# EAGLE board femtobuck-Panel-v10 (EAGLE 6.5.0), part 1 of 2
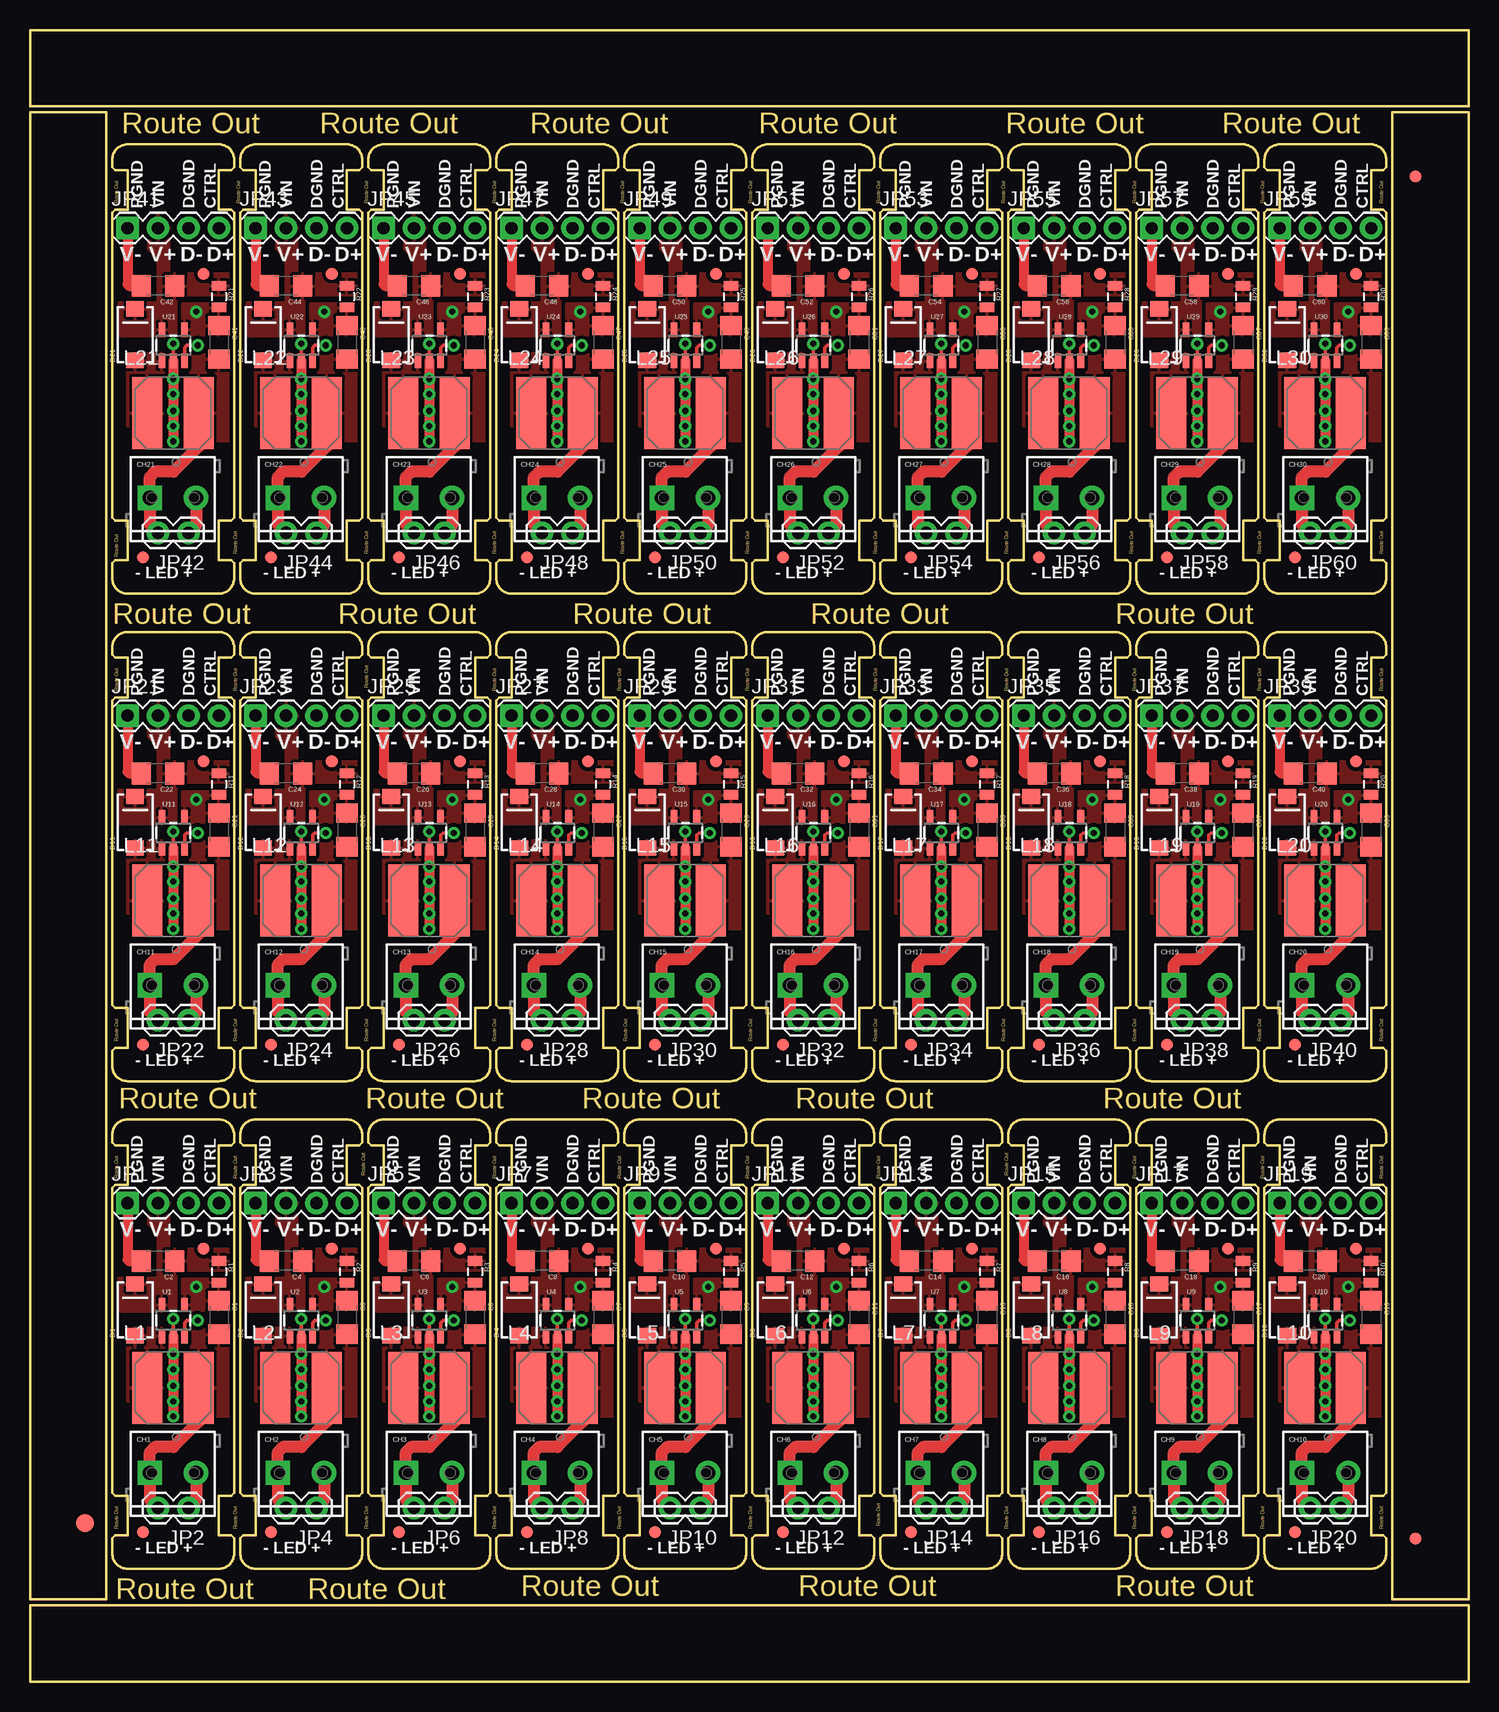
[diagram p0: board, top side]
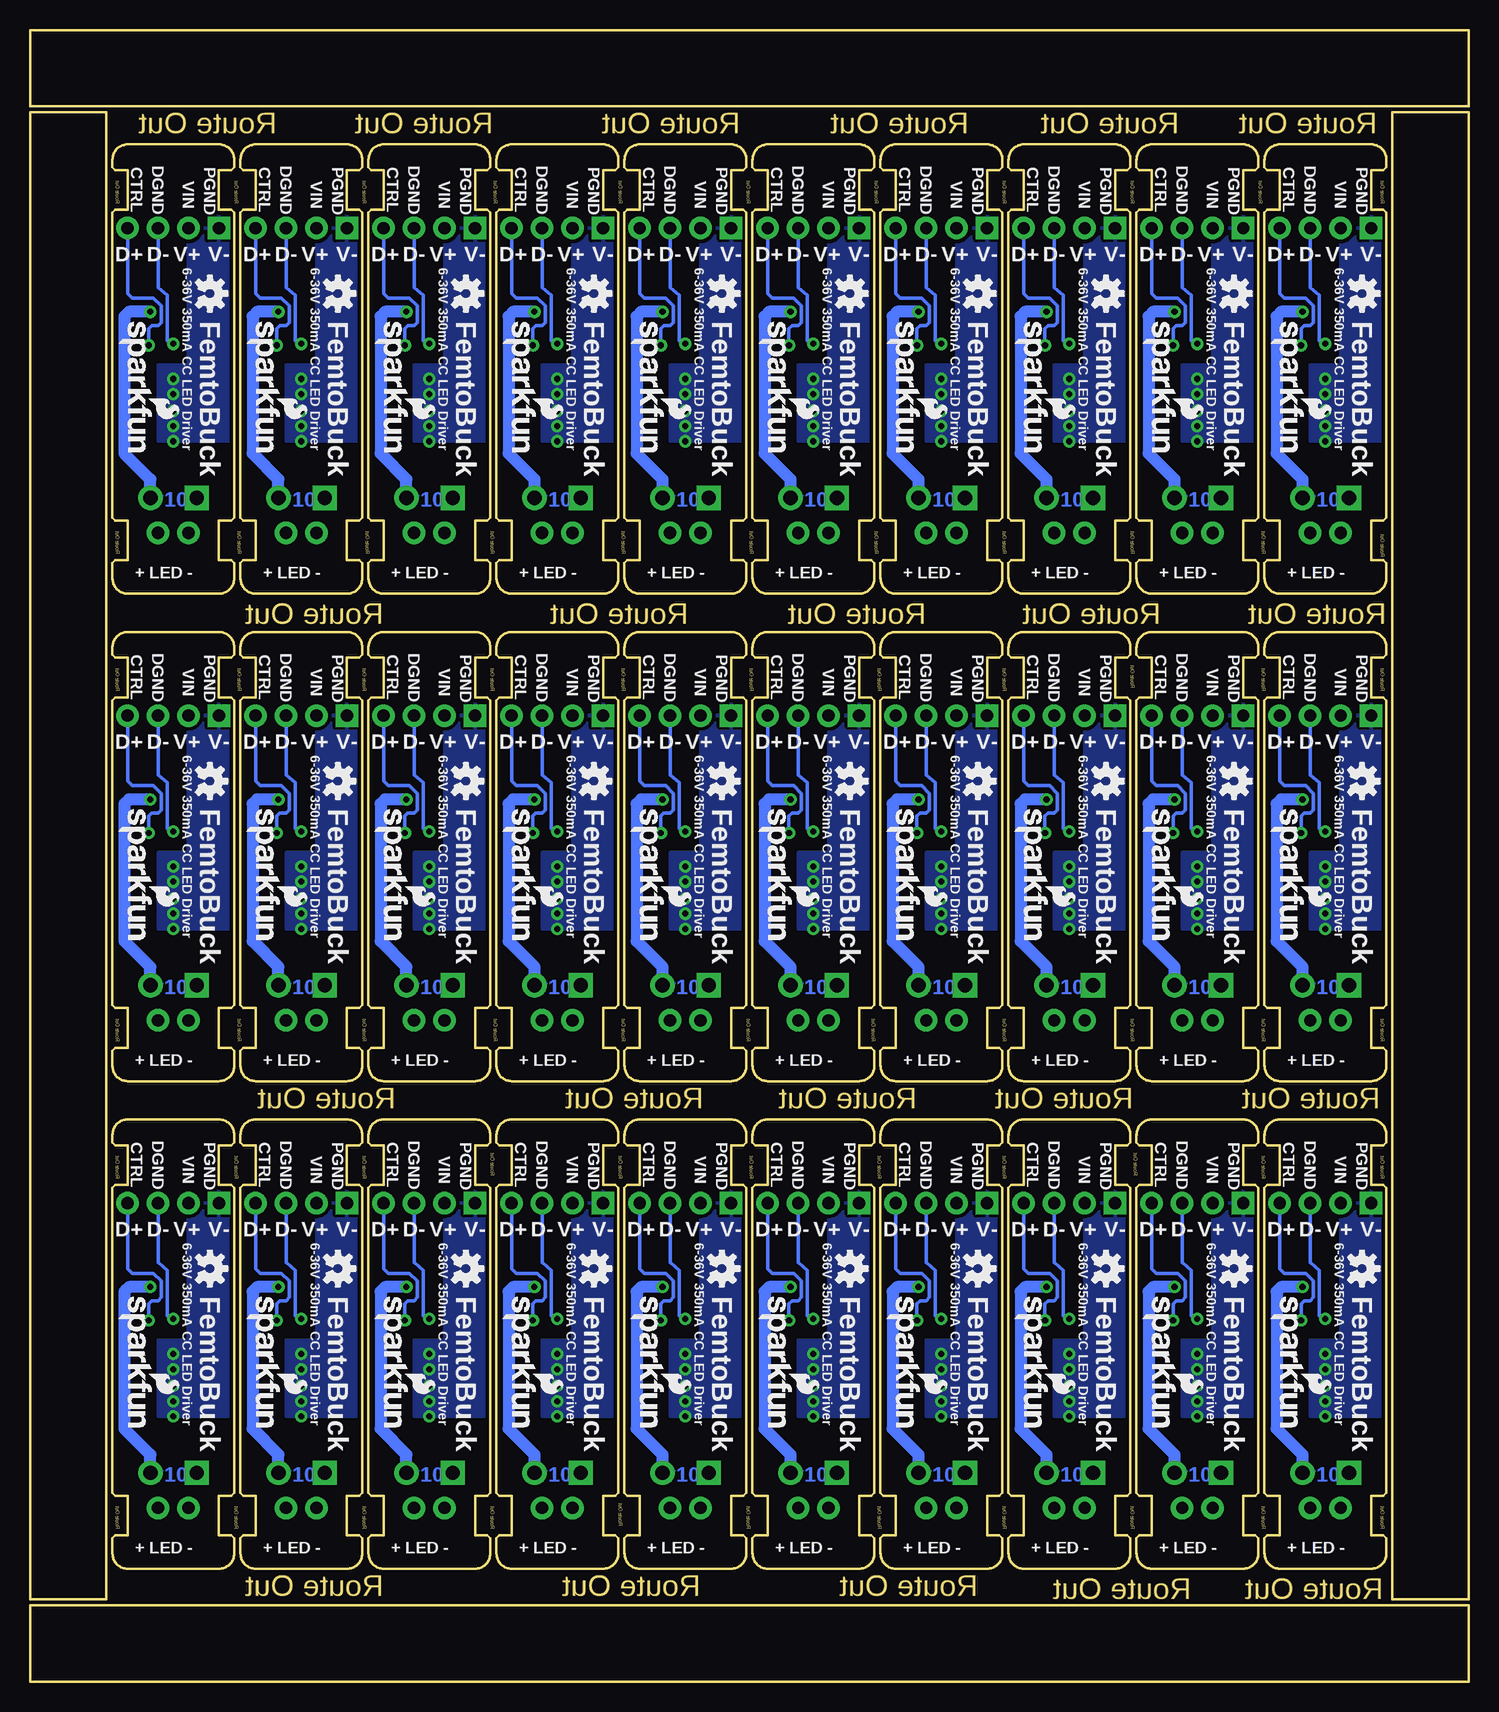
[diagram p1: board, bottom side, seen from below]

Size 119.89 x 137.67 mm. Coordinates in mm from the lower left corner, seen from the top.
Outline: 980 segments
Copper layers (1*16): Top 0.035mm / dielectric 1.5mm / Bottom 0.035mm
Design rules "Sparkfun": minimum track width 8mil, minimum drill 20mil, track to track 8mil, track to pad 8mil, pad to pad 8mil, via to via 8mil, smd to smd 8mil, copper to edge 8mil, drill to drill 8mil, minimum pad ring 12mil, minimum via ring 10mil, stop-mask expansion 4mil, vias tented up to drill 20mil, thermal gap 10mil
Net classes: 0 default: width 0.254 mm; 1 power: width 0.508 mm

## Footprints (pad centres in the part's own frame; a part is rotated, then mirrored left to right if it is on the bottom)
1206 = smd 1.6 x 1.8: 1 -1.4,0; 2 1.4,0
SCREWTERMINAL-3.5MM-2_LOCK = drill 1.2 pad 2.032 square: 1 -0.178,0 | drill 1.2 pad 2.032: 2 3.678,0
SMA-DIODE = smd 1.27 x 1.47: A -2.15,0; C 2.15,0
FIDUCIAL-1.5X3 = smd 1.5 x 1.5: 1 0,0
FIDUCIAL-1X2 = smd 1 x 1: 1 0,0
1X04 = drill 1.016 pad 1.88 square: 1 0,0 | drill 1.016 pad 1.88: 2 2.54,0; 3 5.08,0; 4 7.62,0
1X02 = drill 1.016 pad 1.88: 1 0,0; 2 2.54,0
SRN6045 = smd 2.5 x 6: 1 -2.175,-0.175; 2 2.125,-0.175
0805 = smd 0.8 x 1.2: 1 -0.9,0; 2 0.9,0
SOT23-5 = smd 0.55 x 1.2: 1 -0.95,-1.3; 2 0,-1.3; 3 0.95,-1.3; 4 0.95,1.3; 5 -0.95,1.3

## Placement (x,y rotation side)
C1  1uF  [1206]  15.75,30.35 270 top
C2  2.2uF  [1206]  10.67,35.05 180 top
C3  1uF  [1206]  26.42,30.35 270 top
C4  2.2uF  [1206]  21.34,35.05 180 top
C5  1uF  [1206]  37.08,30.35 270 top
C6  2.2uF  [1206]  32,35.05 180 top
C7  1uF  [1206]  47.75,30.35 270 top
C8  2.2uF  [1206]  42.67,35.05 180 top
C9  1uF  [1206]  58.42,30.35 270 top
C10  2.2uF  [1206]  53.34,35.05 180 top
C11  1uF  [1206]  69.09,30.35 270 top
C12  2.2uF  [1206]  64.01,35.05 180 top
C13  1uF  [1206]  79.76,30.35 270 top
C14  2.2uF  [1206]  74.68,35.05 180 top
C15  1uF  [1206]  90.42,30.35 270 top
C16  2.2uF  [1206]  85.34,35.05 180 top
C17  1uF  [1206]  101.09,30.35 270 top
C18  2.2uF  [1206]  96.01,35.05 180 top
C19  1uF  [1206]  111.76,30.35 270 top
C20  2.2uF  [1206]  106.68,35.05 180 top
C21  1uF  [1206]  15.75,70.99 270 top
C22  2.2uF  [1206]  10.67,75.69 180 top
C23  1uF  [1206]  26.42,70.99 270 top
C24  2.2uF  [1206]  21.34,75.69 180 top
C25  1uF  [1206]  37.08,70.99 270 top
C26  2.2uF  [1206]  32,75.69 180 top
C27  1uF  [1206]  47.75,70.99 270 top
C28  2.2uF  [1206]  42.67,75.69 180 top
C29  1uF  [1206]  58.42,70.99 270 top
C30  2.2uF  [1206]  53.34,75.69 180 top
C31  1uF  [1206]  69.09,70.99 270 top
C32  2.2uF  [1206]  64.01,75.69 180 top
C33  1uF  [1206]  79.76,70.99 270 top
C34  2.2uF  [1206]  74.68,75.69 180 top
C35  1uF  [1206]  90.42,70.99 270 top
C36  2.2uF  [1206]  85.34,75.69 180 top
C37  1uF  [1206]  101.09,70.99 270 top
C38  2.2uF  [1206]  96.01,75.69 180 top
C39  1uF  [1206]  111.76,70.99 270 top
C40  2.2uF  [1206]  106.68,75.69 180 top
C41  1uF  [1206]  15.75,111.63 270 top
C42  2.2uF  [1206]  10.67,116.33 180 top
C43  1uF  [1206]  26.42,111.63 270 top
C44  2.2uF  [1206]  21.34,116.33 180 top
C45  1uF  [1206]  37.08,111.63 270 top
C46  2.2uF  [1206]  32,116.33 180 top
C47  1uF  [1206]  47.75,111.63 270 top
C48  2.2uF  [1206]  42.67,116.33 180 top
C49  1uF  [1206]  58.42,111.63 270 top
C50  2.2uF  [1206]  53.34,116.33 180 top
C51  1uF  [1206]  69.09,111.63 270 top
C52  2.2uF  [1206]  64.01,116.33 180 top
C53  1uF  [1206]  79.76,111.63 270 top
C54  2.2uF  [1206]  74.68,116.33 180 top
C55  1uF  [1206]  90.42,111.63 270 top
C56  2.2uF  [1206]  85.34,116.33 180 top
C57  1uF  [1206]  101.09,111.63 270 top
C58  2.2uF  [1206]  96.01,116.33 180 top
C59  1uF  [1206]  111.76,111.63 270 top
C60  2.2uF  [1206]  106.68,116.33 180 top
CH1  [SCREWTERMINAL-3.5MM-2_LOCK]  10.16,17.4 0 top
CH2  [SCREWTERMINAL-3.5MM-2_LOCK]  20.83,17.4 0 top
CH3  [SCREWTERMINAL-3.5MM-2_LOCK]  31.5,17.4 0 top
CH4  [SCREWTERMINAL-3.5MM-2_LOCK]  42.16,17.4 0 top
CH5  [SCREWTERMINAL-3.5MM-2_LOCK]  52.83,17.4 0 top
CH6  [SCREWTERMINAL-3.5MM-2_LOCK]  63.5,17.4 0 top
CH7  [SCREWTERMINAL-3.5MM-2_LOCK]  74.17,17.4 0 top
CH8  [SCREWTERMINAL-3.5MM-2_LOCK]  84.84,17.4 0 top
CH9  [SCREWTERMINAL-3.5MM-2_LOCK]  95.5,17.4 0 top
CH10  [SCREWTERMINAL-3.5MM-2_LOCK]  106.17,17.4 0 top
CH11  [SCREWTERMINAL-3.5MM-2_LOCK]  10.16,58.04 0 top
CH12  [SCREWTERMINAL-3.5MM-2_LOCK]  20.83,58.04 0 top
CH13  [SCREWTERMINAL-3.5MM-2_LOCK]  31.5,58.04 0 top
CH14  [SCREWTERMINAL-3.5MM-2_LOCK]  42.16,58.04 0 top
CH15  [SCREWTERMINAL-3.5MM-2_LOCK]  52.83,58.04 0 top
CH16  [SCREWTERMINAL-3.5MM-2_LOCK]  63.5,58.04 0 top
CH17  [SCREWTERMINAL-3.5MM-2_LOCK]  74.17,58.04 0 top
CH18  [SCREWTERMINAL-3.5MM-2_LOCK]  84.84,58.04 0 top
CH19  [SCREWTERMINAL-3.5MM-2_LOCK]  95.5,58.04 0 top
CH20  [SCREWTERMINAL-3.5MM-2_LOCK]  106.17,58.04 0 top
CH21  [SCREWTERMINAL-3.5MM-2_LOCK]  10.16,98.68 0 top
CH22  [SCREWTERMINAL-3.5MM-2_LOCK]  20.83,98.68 0 top
CH23  [SCREWTERMINAL-3.5MM-2_LOCK]  31.5,98.68 0 top
CH24  [SCREWTERMINAL-3.5MM-2_LOCK]  42.16,98.68 0 top
CH25  [SCREWTERMINAL-3.5MM-2_LOCK]  52.83,98.68 0 top
CH26  [SCREWTERMINAL-3.5MM-2_LOCK]  63.5,98.68 0 top
CH27  [SCREWTERMINAL-3.5MM-2_LOCK]  74.17,98.68 0 top
CH28  [SCREWTERMINAL-3.5MM-2_LOCK]  84.84,98.68 0 top
CH29  [SCREWTERMINAL-3.5MM-2_LOCK]  95.5,98.68 0 top
CH30  [SCREWTERMINAL-3.5MM-2_LOCK]  106.17,98.68 0 top
D1  MBRA140  [SMA-DIODE]  8.76,30.99 90 top
D2  MBRA140  [SMA-DIODE]  19.43,30.99 90 top
D3  MBRA140  [SMA-DIODE]  30.1,30.99 90 top
D4  MBRA140  [SMA-DIODE]  40.77,30.99 90 top
D5  MBRA140  [SMA-DIODE]  51.44,30.99 90 top
D6  MBRA140  [SMA-DIODE]  62.1,30.99 90 top
D7  MBRA140  [SMA-DIODE]  72.77,30.99 90 top
D8  MBRA140  [SMA-DIODE]  83.44,30.99 90 top
D9  MBRA140  [SMA-DIODE]  94.11,30.99 90 top
D10  MBRA140  [SMA-DIODE]  104.78,30.99 90 top
D11  MBRA140  [SMA-DIODE]  8.76,71.63 90 top
D12  MBRA140  [SMA-DIODE]  19.43,71.63 90 top
D13  MBRA140  [SMA-DIODE]  30.1,71.63 90 top
D14  MBRA140  [SMA-DIODE]  40.77,71.63 90 top
D15  MBRA140  [SMA-DIODE]  51.44,71.63 90 top
D16  MBRA140  [SMA-DIODE]  62.1,71.63 90 top
D17  MBRA140  [SMA-DIODE]  72.77,71.63 90 top
D18  MBRA140  [SMA-DIODE]  83.44,71.63 90 top
D19  MBRA140  [SMA-DIODE]  94.11,71.63 90 top
D20  MBRA140  [SMA-DIODE]  104.78,71.63 90 top
D21  MBRA140  [SMA-DIODE]  8.76,112.27 90 top
D22  MBRA140  [SMA-DIODE]  19.43,112.27 90 top
D23  MBRA140  [SMA-DIODE]  30.1,112.27 90 top
D24  MBRA140  [SMA-DIODE]  40.77,112.27 90 top
D25  MBRA140  [SMA-DIODE]  51.44,112.27 90 top
D26  MBRA140  [SMA-DIODE]  62.1,112.27 90 top
D27  MBRA140  [SMA-DIODE]  72.77,112.27 90 top
D28  MBRA140  [SMA-DIODE]  83.44,112.27 90 top
D29  MBRA140  [SMA-DIODE]  94.11,112.27 90 top
D30  MBRA140  [SMA-DIODE]  104.78,112.27 90 top
E$1  [FIDUCIAL-1.5X3]  4.57,13.21 0 top
E$4  [FIDUCIAL-1X2]  115.44,11.94 0 top
E$5  [FIDUCIAL-1X2]  115.44,125.48 180 top
FID1  FIDUCIAL1X2  [FIDUCIAL-1X2]  14.48,36.07 0 top
FID2  FIDUCIAL1X2  [FIDUCIAL-1X2]  9.4,12.45 0 top
FID3  FIDUCIAL1X2  [FIDUCIAL-1X2]  25.15,36.07 0 top
FID4  FIDUCIAL1X2  [FIDUCIAL-1X2]  20.07,12.45 0 top
FID5  FIDUCIAL1X2  [FIDUCIAL-1X2]  35.81,36.07 0 top
FID6  FIDUCIAL1X2  [FIDUCIAL-1X2]  30.73,12.45 0 top
FID7  FIDUCIAL1X2  [FIDUCIAL-1X2]  46.48,36.07 0 top
FID8  FIDUCIAL1X2  [FIDUCIAL-1X2]  41.4,12.45 0 top
FID9  FIDUCIAL1X2  [FIDUCIAL-1X2]  57.15,36.07 0 top
FID10  FIDUCIAL1X2  [FIDUCIAL-1X2]  52.07,12.45 0 top
FID11  FIDUCIAL1X2  [FIDUCIAL-1X2]  67.82,36.07 0 top
FID12  FIDUCIAL1X2  [FIDUCIAL-1X2]  62.74,12.45 0 top
FID13  FIDUCIAL1X2  [FIDUCIAL-1X2]  78.49,36.07 0 top
FID14  FIDUCIAL1X2  [FIDUCIAL-1X2]  73.41,12.45 0 top
FID15  FIDUCIAL1X2  [FIDUCIAL-1X2]  89.15,36.07 0 top
FID16  FIDUCIAL1X2  [FIDUCIAL-1X2]  84.07,12.45 0 top
FID17  FIDUCIAL1X2  [FIDUCIAL-1X2]  99.82,36.07 0 top
FID18  FIDUCIAL1X2  [FIDUCIAL-1X2]  94.74,12.45 0 top
FID19  FIDUCIAL1X2  [FIDUCIAL-1X2]  110.49,36.07 0 top
FID20  FIDUCIAL1X2  [FIDUCIAL-1X2]  105.41,12.45 0 top
FID21  FIDUCIAL1X2  [FIDUCIAL-1X2]  14.48,76.71 0 top
FID22  FIDUCIAL1X2  [FIDUCIAL-1X2]  9.4,53.09 0 top
FID23  FIDUCIAL1X2  [FIDUCIAL-1X2]  25.15,76.71 0 top
FID24  FIDUCIAL1X2  [FIDUCIAL-1X2]  20.07,53.09 0 top
FID25  FIDUCIAL1X2  [FIDUCIAL-1X2]  35.81,76.71 0 top
FID26  FIDUCIAL1X2  [FIDUCIAL-1X2]  30.73,53.09 0 top
FID27  FIDUCIAL1X2  [FIDUCIAL-1X2]  46.48,76.71 0 top
FID28  FIDUCIAL1X2  [FIDUCIAL-1X2]  41.4,53.09 0 top
FID29  FIDUCIAL1X2  [FIDUCIAL-1X2]  57.15,76.71 0 top
FID30  FIDUCIAL1X2  [FIDUCIAL-1X2]  52.07,53.09 0 top
FID31  FIDUCIAL1X2  [FIDUCIAL-1X2]  67.82,76.71 0 top
FID32  FIDUCIAL1X2  [FIDUCIAL-1X2]  62.74,53.09 0 top
FID33  FIDUCIAL1X2  [FIDUCIAL-1X2]  78.49,76.71 0 top
FID34  FIDUCIAL1X2  [FIDUCIAL-1X2]  73.41,53.09 0 top
FID35  FIDUCIAL1X2  [FIDUCIAL-1X2]  89.15,76.71 0 top
FID36  FIDUCIAL1X2  [FIDUCIAL-1X2]  84.07,53.09 0 top
FID37  FIDUCIAL1X2  [FIDUCIAL-1X2]  99.82,76.71 0 top
FID38  FIDUCIAL1X2  [FIDUCIAL-1X2]  94.74,53.09 0 top
FID39  FIDUCIAL1X2  [FIDUCIAL-1X2]  110.49,76.71 0 top
FID40  FIDUCIAL1X2  [FIDUCIAL-1X2]  105.41,53.09 0 top
FID41  FIDUCIAL1X2  [FIDUCIAL-1X2]  14.48,117.35 0 top
FID42  FIDUCIAL1X2  [FIDUCIAL-1X2]  9.4,93.73 0 top
FID43  FIDUCIAL1X2  [FIDUCIAL-1X2]  25.15,117.35 0 top
FID44  FIDUCIAL1X2  [FIDUCIAL-1X2]  20.07,93.73 0 top
FID45  FIDUCIAL1X2  [FIDUCIAL-1X2]  35.81,117.35 0 top
FID46  FIDUCIAL1X2  [FIDUCIAL-1X2]  30.73,93.73 0 top
FID47  FIDUCIAL1X2  [FIDUCIAL-1X2]  46.48,117.35 0 top
FID48  FIDUCIAL1X2  [FIDUCIAL-1X2]  41.4,93.73 0 top
FID49  FIDUCIAL1X2  [FIDUCIAL-1X2]  57.15,117.35 0 top
FID50  FIDUCIAL1X2  [FIDUCIAL-1X2]  52.07,93.73 0 top
FID51  FIDUCIAL1X2  [FIDUCIAL-1X2]  67.82,117.35 0 top
FID52  FIDUCIAL1X2  [FIDUCIAL-1X2]  62.74,93.73 0 top
FID53  FIDUCIAL1X2  [FIDUCIAL-1X2]  78.49,117.35 0 top
FID54  FIDUCIAL1X2  [FIDUCIAL-1X2]  73.41,93.73 0 top
FID55  FIDUCIAL1X2  [FIDUCIAL-1X2]  89.15,117.35 0 top
FID56  FIDUCIAL1X2  [FIDUCIAL-1X2]  84.07,93.73 0 top
FID57  FIDUCIAL1X2  [FIDUCIAL-1X2]  99.82,117.35 0 top
FID58  FIDUCIAL1X2  [FIDUCIAL-1X2]  94.74,93.73 0 top
FID59  FIDUCIAL1X2  [FIDUCIAL-1X2]  110.49,117.35 0 top
FID60  FIDUCIAL1X2  [FIDUCIAL-1X2]  105.41,93.73 0 top
JP1  [1X04]  8.13,39.88 0 top
JP2  M02PTH  [1X02]  13.21,14.48 180 top
JP3  [1X04]  18.8,39.88 0 top
JP4  M02PTH  [1X02]  23.88,14.48 180 top
JP5  [1X04]  29.46,39.88 0 top
JP6  M02PTH  [1X02]  34.54,14.48 180 top
JP7  [1X04]  40.13,39.88 0 top
JP8  M02PTH  [1X02]  45.21,14.48 180 top
JP9  [1X04]  50.8,39.88 0 top
JP10  M02PTH  [1X02]  55.88,14.48 180 top
JP11  [1X04]  61.47,39.88 0 top
JP12  M02PTH  [1X02]  66.55,14.48 180 top
JP13  [1X04]  72.14,39.88 0 top
JP14  M02PTH  [1X02]  77.22,14.48 180 top
JP15  [1X04]  82.8,39.88 0 top
JP16  M02PTH  [1X02]  87.88,14.48 180 top
JP17  [1X04]  93.47,39.88 0 top
JP18  M02PTH  [1X02]  98.55,14.48 180 top
JP19  [1X04]  104.14,39.88 0 top
JP20  M02PTH  [1X02]  109.22,14.48 180 top
JP21  [1X04]  8.13,80.52 0 top
JP22  M02PTH  [1X02]  13.21,55.12 180 top
JP23  [1X04]  18.8,80.52 0 top
JP24  M02PTH  [1X02]  23.88,55.12 180 top
JP25  [1X04]  29.46,80.52 0 top
JP26  M02PTH  [1X02]  34.54,55.12 180 top
JP27  [1X04]  40.13,80.52 0 top
JP28  M02PTH  [1X02]  45.21,55.12 180 top
JP29  [1X04]  50.8,80.52 0 top
JP30  M02PTH  [1X02]  55.88,55.12 180 top
JP31  [1X04]  61.47,80.52 0 top
JP32  M02PTH  [1X02]  66.55,55.12 180 top
JP33  [1X04]  72.14,80.52 0 top
JP34  M02PTH  [1X02]  77.22,55.12 180 top
JP35  [1X04]  82.8,80.52 0 top
JP36  M02PTH  [1X02]  87.88,55.12 180 top
JP37  [1X04]  93.47,80.52 0 top
JP38  M02PTH  [1X02]  98.55,55.12 180 top
JP39  [1X04]  104.14,80.52 0 top
JP40  M02PTH  [1X02]  109.22,55.12 180 top
JP41  [1X04]  8.13,121.16 0 top
JP42  M02PTH  [1X02]  13.21,95.76 180 top
JP43  [1X04]  18.8,121.16 0 top
JP44  M02PTH  [1X02]  23.88,95.76 180 top
JP45  [1X04]  29.46,121.16 0 top
JP46  M02PTH  [1X02]  34.54,95.76 180 top
JP47  [1X04]  40.13,121.16 0 top
JP48  M02PTH  [1X02]  45.21,95.76 180 top
JP49  [1X04]  50.8,121.16 0 top
JP50  M02PTH  [1X02]  55.88,95.76 180 top
JP51  [1X04]  61.47,121.16 0 top
JP52  M02PTH  [1X02]  66.55,95.76 180 top
JP53  [1X04]  72.14,121.16 0 top
JP54  M02PTH  [1X02]  77.22,95.76 180 top
JP55  [1X04]  82.8,121.16 0 top
JP56  M02PTH  [1X02]  87.88,95.76 180 top
JP57  [1X04]  93.47,121.16 0 top
JP58  M02PTH  [1X02]  98.55,95.76 180 top
JP59  [1X04]  104.14,121.16 0 top
JP60  M02PTH  [1X02]  109.22,95.76 180 top
L1  33uH  [SRN6045]  11.94,24.64 0 top
L2  33uH  [SRN6045]  22.61,24.64 0 top
L3  33uH  [SRN6045]  33.27,24.64 0 top
L4  33uH  [SRN6045]  43.94,24.64 0 top
L5  33uH  [SRN6045]  54.61,24.64 0 top
L6  33uH  [SRN6045]  65.28,24.64 0 top
L7  33uH  [SRN6045]  75.95,24.64 0 top
L8  33uH  [SRN6045]  86.61,24.64 0 top
L9  33uH  [SRN6045]  97.28,24.64 0 top
L10  33uH  [SRN6045]  107.95,24.64 0 top
L11  33uH  [SRN6045]  11.94,65.28 0 top
L12  33uH  [SRN6045]  22.61,65.28 0 top
L13  33uH  [SRN6045]  33.27,65.28 0 top
L14  33uH  [SRN6045]  43.94,65.28 0 top
L15  33uH  [SRN6045]  54.61,65.28 0 top
L16  33uH  [SRN6045]  65.28,65.28 0 top
L17  33uH  [SRN6045]  75.95,65.28 0 top
L18  33uH  [SRN6045]  86.61,65.28 0 top
L19  33uH  [SRN6045]  97.28,65.28 0 top
L20  33uH  [SRN6045]  107.95,65.28 0 top
L21  33uH  [SRN6045]  11.94,105.92 0 top
L22  33uH  [SRN6045]  22.61,105.92 0 top
L23  33uH  [SRN6045]  33.27,105.92 0 top
L24  33uH  [SRN6045]  43.94,105.92 0 top
L25  33uH  [SRN6045]  54.61,105.92 0 top
L26  33uH  [SRN6045]  65.28,105.92 0 top
L27  33uH  [SRN6045]  75.95,105.92 0 top
L28  33uH  [SRN6045]  86.61,105.92 0 top
L29  33uH  [SRN6045]  97.28,105.92 0 top
L30  33uH  [SRN6045]  107.95,105.92 0 top
LOGO1  OSHW-LOGOS  [OSHW-LOGO-S]  8.89,34.42 270 bottom
LOGO2  SFE_LOGO_NAME_FLAME.1_INCH  [SFE_LOGO_NAME_FLAME_.1]  16.64,32.51 270 bottom
LOGO3  OSHW-LOGOS  [OSHW-LOGO-S]  19.56,34.42 270 bottom
LOGO4  SFE_LOGO_NAME_FLAME.1_INCH  [SFE_LOGO_NAME_FLAME_.1]  27.3,32.51 270 bottom
LOGO5  OSHW-LOGOS  [OSHW-LOGO-S]  30.23,34.42 270 bottom
LOGO6  SFE_LOGO_NAME_FLAME.1_INCH  [SFE_LOGO_NAME_FLAME_.1]  37.97,32.51 270 bottom
LOGO7  OSHW-LOGOS  [OSHW-LOGO-S]  40.89,34.42 270 bottom
LOGO8  SFE_LOGO_NAME_FLAME.1_INCH  [SFE_LOGO_NAME_FLAME_.1]  48.64,32.51 270 bottom
LOGO9  OSHW-LOGOS  [OSHW-LOGO-S]  51.56,34.42 270 bottom
LOGO10  SFE_LOGO_NAME_FLAME.1_INCH  [SFE_LOGO_NAME_FLAME_.1]  59.31,32.51 270 bottom
LOGO11  OSHW-LOGOS  [OSHW-LOGO-S]  62.23,34.42 270 bottom
LOGO12  SFE_LOGO_NAME_FLAME.1_INCH  [SFE_LOGO_NAME_FLAME_.1]  69.98,32.51 270 bottom
LOGO13  OSHW-LOGOS  [OSHW-LOGO-S]  72.9,34.42 270 bottom
LOGO14  SFE_LOGO_NAME_FLAME.1_INCH  [SFE_LOGO_NAME_FLAME_.1]  80.64,32.51 270 bottom
LOGO15  OSHW-LOGOS  [OSHW-LOGO-S]  83.57,34.42 270 bottom
LOGO16  SFE_LOGO_NAME_FLAME.1_INCH  [SFE_LOGO_NAME_FLAME_.1]  91.31,32.51 270 bottom
LOGO17  OSHW-LOGOS  [OSHW-LOGO-S]  94.23,34.42 270 bottom
LOGO18  SFE_LOGO_NAME_FLAME.1_INCH  [SFE_LOGO_NAME_FLAME_.1]  101.98,32.51 270 bottom
LOGO19  OSHW-LOGOS  [OSHW-LOGO-S]  104.9,34.42 270 bottom
LOGO20  SFE_LOGO_NAME_FLAME.1_INCH  [SFE_LOGO_NAME_FLAME_.1]  112.65,32.51 270 bottom
LOGO21  OSHW-LOGOS  [OSHW-LOGO-S]  8.89,75.06 270 bottom
LOGO22  SFE_LOGO_NAME_FLAME.1_INCH  [SFE_LOGO_NAME_FLAME_.1]  16.64,73.15 270 bottom
LOGO23  OSHW-LOGOS  [OSHW-LOGO-S]  19.56,75.06 270 bottom
LOGO24  SFE_LOGO_NAME_FLAME.1_INCH  [SFE_LOGO_NAME_FLAME_.1]  27.3,73.15 270 bottom
LOGO25  OSHW-LOGOS  [OSHW-LOGO-S]  30.23,75.06 270 bottom
LOGO26  SFE_LOGO_NAME_FLAME.1_INCH  [SFE_LOGO_NAME_FLAME_.1]  37.97,73.15 270 bottom
LOGO27  OSHW-LOGOS  [OSHW-LOGO-S]  40.89,75.06 270 bottom
LOGO28  SFE_LOGO_NAME_FLAME.1_INCH  [SFE_LOGO_NAME_FLAME_.1]  48.64,73.15 270 bottom
LOGO29  OSHW-LOGOS  [OSHW-LOGO-S]  51.56,75.06 270 bottom
LOGO30  SFE_LOGO_NAME_FLAME.1_INCH  [SFE_LOGO_NAME_FLAME_.1]  59.31,73.15 270 bottom
LOGO31  OSHW-LOGOS  [OSHW-LOGO-S]  62.23,75.06 270 bottom
LOGO32  SFE_LOGO_NAME_FLAME.1_INCH  [SFE_LOGO_NAME_FLAME_.1]  69.98,73.15 270 bottom
LOGO33  OSHW-LOGOS  [OSHW-LOGO-S]  72.9,75.06 270 bottom
LOGO34  SFE_LOGO_NAME_FLAME.1_INCH  [SFE_LOGO_NAME_FLAME_.1]  80.64,73.15 270 bottom
LOGO35  OSHW-LOGOS  [OSHW-LOGO-S]  83.57,75.06 270 bottom
LOGO36  SFE_LOGO_NAME_FLAME.1_INCH  [SFE_LOGO_NAME_FLAME_.1]  91.31,73.15 270 bottom
LOGO37  OSHW-LOGOS  [OSHW-LOGO-S]  94.23,75.06 270 bottom
LOGO38  SFE_LOGO_NAME_FLAME.1_INCH  [SFE_LOGO_NAME_FLAME_.1]  101.98,73.15 270 bottom
LOGO39  OSHW-LOGOS  [OSHW-LOGO-S]  104.9,75.06 270 bottom
LOGO40  SFE_LOGO_NAME_FLAME.1_INCH  [SFE_LOGO_NAME_FLAME_.1]  112.65,73.15 270 bottom
LOGO41  OSHW-LOGOS  [OSHW-LOGO-S]  8.89,115.7 270 bottom
LOGO42  SFE_LOGO_NAME_FLAME.1_INCH  [SFE_LOGO_NAME_FLAME_.1]  16.64,113.79 270 bottom
LOGO43  OSHW-LOGOS  [OSHW-LOGO-S]  19.56,115.7 270 bottom
LOGO44  SFE_LOGO_NAME_FLAME.1_INCH  [SFE_LOGO_NAME_FLAME_.1]  27.3,113.79 270 bottom
LOGO45  OSHW-LOGOS  [OSHW-LOGO-S]  30.23,115.7 270 bottom
LOGO46  SFE_LOGO_NAME_FLAME.1_INCH  [SFE_LOGO_NAME_FLAME_.1]  37.97,113.79 270 bottom
LOGO47  OSHW-LOGOS  [OSHW-LOGO-S]  40.89,115.7 270 bottom
LOGO48  SFE_LOGO_NAME_FLAME.1_INCH  [SFE_LOGO_NAME_FLAME_.1]  48.64,113.79 270 bottom
LOGO49  OSHW-LOGOS  [OSHW-LOGO-S]  51.56,115.7 270 bottom
LOGO50  SFE_LOGO_NAME_FLAME.1_INCH  [SFE_LOGO_NAME_FLAME_.1]  59.31,113.79 270 bottom
LOGO51  OSHW-LOGOS  [OSHW-LOGO-S]  62.23,115.7 270 bottom
LOGO52  SFE_LOGO_NAME_FLAME.1_INCH  [SFE_LOGO_NAME_FLAME_.1]  69.98,113.79 270 bottom
LOGO53  OSHW-LOGOS  [OSHW-LOGO-S]  72.9,115.7 270 bottom
LOGO54  SFE_LOGO_NAME_FLAME.1_INCH  [SFE_LOGO_NAME_FLAME_.1]  80.64,113.79 270 bottom
LOGO55  OSHW-LOGOS  [OSHW-LOGO-S]  83.57,115.7 270 bottom
LOGO56  SFE_LOGO_NAME_FLAME.1_INCH  [SFE_LOGO_NAME_FLAME_.1]  91.31,113.79 270 bottom
LOGO57  OSHW-LOGOS  [OSHW-LOGO-S]  94.23,115.7 270 bottom
LOGO58  SFE_LOGO_NAME_FLAME.1_INCH  [SFE_LOGO_NAME_FLAME_.1]  101.98,113.79 270 bottom
LOGO59  OSHW-LOGOS  [OSHW-LOGO-S]  104.9,115.7 270 bottom
LOGO60  SFE_LOGO_NAME_FLAME.1_INCH  [SFE_LOGO_NAME_FLAME_.1]  112.65,113.79 270 bottom
R1  0.3R  [0805]  15.75,34.16 270 top
R2  0.3R  [0805]  26.42,34.16 270 top
R3  0.3R  [0805]  37.08,34.16 270 top
R4  0.3R  [0805]  47.75,34.16 270 top
R5  0.3R  [0805]  58.42,34.16 270 top
R6  0.3R  [0805]  69.09,34.16 270 top
R7  0.3R  [0805]  79.76,34.16 270 top
R8  0.3R  [0805]  90.42,34.16 270 top
R9  0.3R  [0805]  101.09,34.16 270 top
R10  0.3R  [0805]  111.76,34.16 270 top
R11  0.3R  [0805]  15.75,74.8 270 top
R12  0.3R  [0805]  26.42,74.8 270 top
R13  0.3R  [0805]  37.08,74.8 270 top
R14  0.3R  [0805]  47.75,74.8 270 top
R15  0.3R  [0805]  58.42,74.8 270 top
R16  0.3R  [0805]  69.09,74.8 270 top
R17  0.3R  [0805]  79.76,74.8 270 top
R18  0.3R  [0805]  90.42,74.8 270 top
R19  0.3R  [0805]  101.09,74.8 270 top
R20  0.3R  [0805]  111.76,74.8 270 top
R21  0.3R  [0805]  15.75,115.44 270 top
R22  0.3R  [0805]  26.42,115.44 270 top
R23  0.3R  [0805]  37.08,115.44 270 top
R24  0.3R  [0805]  47.75,115.44 270 top
R25  0.3R  [0805]  58.42,115.44 270 top
R26  0.3R  [0805]  69.09,115.44 270 top
R27  0.3R  [0805]  79.76,115.44 270 top
R28  0.3R  [0805]  90.42,115.44 270 top
R29  0.3R  [0805]  101.09,115.44 270 top
R30  0.3R  [0805]  111.76,115.44 270 top
U1  [SOT23-5]  11.94,30.1 0 top
U2  [SOT23-5]  22.61,30.1 0 top
U3  [SOT23-5]  33.27,30.1 0 top
U4  [SOT23-5]  43.94,30.1 0 top
U5  [SOT23-5]  54.61,30.1 0 top
U6  [SOT23-5]  65.28,30.1 0 top
U7  [SOT23-5]  75.95,30.1 0 top
U8  [SOT23-5]  86.61,30.1 0 top
U9  [SOT23-5]  97.28,30.1 0 top
U10  [SOT23-5]  107.95,30.1 0 top
U11  [SOT23-5]  11.94,70.74 0 top
U12  [SOT23-5]  22.61,70.74 0 top
U13  [SOT23-5]  33.27,70.74 0 top
U14  [SOT23-5]  43.94,70.74 0 top
U15  [SOT23-5]  54.61,70.74 0 top
U16  [SOT23-5]  65.28,70.74 0 top
U17  [SOT23-5]  75.95,70.74 0 top
U18  [SOT23-5]  86.61,70.74 0 top
U19  [SOT23-5]  97.28,70.74 0 top
U20  [SOT23-5]  107.95,70.74 0 top
U21  [SOT23-5]  11.94,111.38 0 top
U22  [SOT23-5]  22.61,111.38 0 top
U23  [SOT23-5]  33.27,111.38 0 top
U24  [SOT23-5]  43.94,111.38 0 top
U25  [SOT23-5]  54.61,111.38 0 top
U26  [SOT23-5]  65.28,111.38 0 top
U27  [SOT23-5]  75.95,111.38 0 top
U28  [SOT23-5]  86.61,111.38 0 top
U29  [SOT23-5]  97.28,111.38 0 top
U30  [SOT23-5]  107.95,111.38 0 top

## Library data of the parts
C1 C3 C5 C7 C9 C11 C13 C15 C17 C19 C21 C23 C25 C27 C29 C31 C33 C35 C37 C39 C41 C43 C45 C47 C49 C51 C53 C55 C57 C59 = SparkFun-Capacitors; PROD_ID: CAP-09822
C2 C4 C6 C8 C10 C12 C14 C16 C18 C20 C22 C24 C26 C28 C30 C32 C34 C36 C38 C40 C42 C44 C46 C48 C50 C52 C54 C56 C58 C60 = SparkFun-Capacitors; PROD_ID: CAP-10009
CH1-CH30 = SparkFun
D1-D30 = SparkFun-DiscreteSemi; PROD_ID: DIO-08053
E$1 = SparkFun-Retired
E$4 E$5 FID1-FID60 LOGO1-LOGO60 = SparkFun-Aesthetics
JP1-JP60 = SparkFun-Connectors
L1-L30 = SparkFun-Passives; PROD_ID: NDUC-11627
R1-R30 = SparkFun-Resistors; PROD_ID: RES-11622
U1-U30 = SparkFun-PowerIC; PROD_ID: IC-11626

## Nets
CTRL_CH1: JP1.4 U1.3
CTRL_CH2: JP3.4 U2.3
CTRL_CH3: JP5.4 U3.3
CTRL_CH4: JP7.4 U4.3
CTRL_CH5: JP9.4 U5.3
CTRL_CH6: JP11.4 U6.3
CTRL_CH7: JP13.4 U7.3
CTRL_CH8: JP15.4 U8.3
CTRL_CH9: JP17.4 U9.3
CTRL_CH10: JP19.4 U10.3
CTRL_CH11: JP21.4 U11.3
CTRL_CH12: JP23.4 U12.3
CTRL_CH13: JP25.4 U13.3
CTRL_CH14: JP27.4 U14.3
CTRL_CH15: JP29.4 U15.3
CTRL_CH16: JP31.4 U16.3
CTRL_CH17: JP33.4 U17.3
CTRL_CH18: JP35.4 U18.3
CTRL_CH19: JP37.4 U19.3
CTRL_CH20: JP39.4 U20.3
CTRL_CH21: JP41.4 U21.3
CTRL_CH22: JP43.4 U22.3
CTRL_CH23: JP45.4 U23.3
CTRL_CH24: JP47.4 U24.3
CTRL_CH25: JP49.4 U25.3
CTRL_CH26: JP51.4 U26.3
CTRL_CH27: JP53.4 U27.3
CTRL_CH28: JP55.4 U28.3
CTRL_CH29: JP57.4 U29.3
CTRL_CH30: JP59.4 U30.3
GND: C2.2 JP1.1 JP1.3 U1.2
GND1: C4.2 JP3.1 JP3.3 U2.2
GND2: C6.2 JP5.1 JP5.3 U3.2
GND3: C8.2 JP7.1 JP7.3 U4.2
GND4: C10.2 JP9.1 JP9.3 U5.2
GND5: C12.2 JP11.1 JP11.3 U6.2
GND6: C14.2 JP13.1 JP13.3 U7.2
GND7: C16.2 JP15.1 JP15.3 U8.2
GND8: C18.2 JP17.1 JP17.3 U9.2
GND9: C20.2 JP19.1 JP19.3 U10.2
GND10: C22.2 JP21.1 JP21.3 U11.2
GND11: C24.2 JP23.1 JP23.3 U12.2
GND12: C26.2 JP25.1 JP25.3 U13.2
GND13: C28.2 JP27.1 JP27.3 U14.2
GND14: C30.2 JP29.1 JP29.3 U15.2
GND15: C32.2 JP31.1 JP31.3 U16.2
GND16: C34.2 JP33.1 JP33.3 U17.2
GND17: C36.2 JP35.1 JP35.3 U18.2
GND18: C38.2 JP37.1 JP37.3 U19.2
GND19: C40.2 JP39.1 JP39.3 U20.2
GND20: C42.2 JP41.1 JP41.3 U21.2
GND21: C44.2 JP43.1 JP43.3 U22.2
GND22: C46.2 JP45.1 JP45.3 U23.2
GND23: C48.2 JP47.1 JP47.3 U24.2
GND24: C50.2 JP49.1 JP49.3 U25.2
GND25: C52.2 JP51.1 JP51.3 U26.2
GND26: C54.2 JP53.1 JP53.3 U27.2
GND27: C56.2 JP55.1 JP55.3 U28.2
GND28: C58.2 JP57.1 JP57.3 U29.2
GND29: C60.2 JP59.1 JP59.3 U30.2
OUT+: C1.1 CH1.2 JP2.1 R1.2 U1.4
OUT+1: C3.1 CH2.2 JP4.1 R2.2 U2.4
OUT+2: C5.1 CH3.2 JP6.1 R3.2 U3.4
OUT+3: C7.1 CH4.2 JP8.1 R4.2 U4.4
OUT+4: C9.1 CH5.2 JP10.1 R5.2 U5.4
OUT+5: C11.1 CH6.2 JP12.1 R6.2 U6.4
OUT+6: C13.1 CH7.2 JP14.1 R7.2 U7.4
OUT+7: C15.1 CH8.2 JP16.1 R8.2 U8.4
OUT+8: C17.1 CH9.2 JP18.1 R9.2 U9.4
OUT+9: C19.1 CH10.2 JP20.1 R10.2 U10.4
OUT+10: C21.1 CH11.2 JP22.1 R11.2 U11.4
OUT+11: C23.1 CH12.2 JP24.1 R12.2 U12.4
OUT+12: C25.1 CH13.2 JP26.1 R13.2 U13.4
OUT+13: C27.1 CH14.2 JP28.1 R14.2 U14.4
OUT+14: C29.1 CH15.2 JP30.1 R15.2 U15.4
OUT+15: C31.1 CH16.2 JP32.1 R16.2 U16.4
OUT+16: C33.1 CH17.2 JP34.1 R17.2 U17.4
OUT+17: C35.1 CH18.2 JP36.1 R18.2 U18.4
OUT+18: C37.1 CH19.2 JP38.1 R19.2 U19.4
OUT+19: C39.1 CH20.2 JP40.1 R20.2 U20.4
OUT+20: C41.1 CH21.2 JP42.1 R21.2 U21.4
OUT+21: C43.1 CH22.2 JP44.1 R22.2 U22.4
OUT+22: C45.1 CH23.2 JP46.1 R23.2 U23.4
OUT+23: C47.1 CH24.2 JP48.1 R24.2 U24.4
OUT+24: C49.1 CH25.2 JP50.1 R25.2 U25.4
OUT+25: C51.1 CH26.2 JP52.1 R26.2 U26.4
OUT+26: C53.1 CH27.2 JP54.1 R27.2 U27.4
OUT+27: C55.1 CH28.2 JP56.1 R28.2 U28.4
OUT+28: C57.1 CH29.2 JP58.1 R29.2 U29.4
OUT+29: C59.1 CH30.2 JP60.1 R30.2 U30.4
OUT- [power]: C1.2 CH1.1 JP2.2 L1.2
OUT-1 [power]: C3.2 CH2.1 JP4.2 L2.2
OUT-2 [power]: C5.2 CH3.1 JP6.2 L3.2
OUT-3 [power]: C7.2 CH4.1 JP8.2 L4.2
OUT-4 [power]: C9.2 CH5.1 JP10.2 L5.2
OUT-5 [power]: C11.2 CH6.1 JP12.2 L6.2
OUT-6 [power]: C13.2 CH7.1 JP14.2 L7.2
OUT-7 [power]: C15.2 CH8.1 JP16.2 L8.2
OUT-8 [power]: C17.2 CH9.1 JP18.2 L9.2
OUT-9 [power]: C19.2 CH10.1 JP20.2 L10.2
OUT-10 [power]: C21.2 CH11.1 JP22.2 L11.2
OUT-11 [power]: C23.2 CH12.1 JP24.2 L12.2
OUT-12 [power]: C25.2 CH13.1 JP26.2 L13.2
OUT-13 [power]: C27.2 CH14.1 JP28.2 L14.2
OUT-14 [power]: C29.2 CH15.1 JP30.2 L15.2
OUT-15 [power]: C31.2 CH16.1 JP32.2 L16.2
OUT-16 [power]: C33.2 CH17.1 JP34.2 L17.2
OUT-17 [power]: C35.2 CH18.1 JP36.2 L18.2
OUT-18 [power]: C37.2 CH19.1 JP38.2 L19.2
OUT-19 [power]: C39.2 CH20.1 JP40.2 L20.2
OUT-20 [power]: C41.2 CH21.1 JP42.2 L21.2
OUT-21 [power]: C43.2 CH22.1 JP44.2 L22.2
OUT-22 [power]: C45.2 CH23.1 JP46.2 L23.2
OUT-23 [power]: C47.2 CH24.1 JP48.2 L24.2
OUT-24 [power]: C49.2 CH25.1 JP50.2 L25.2
OUT-25 [power]: C51.2 CH26.1 JP52.2 L26.2
OUT-26 [power]: C53.2 CH27.1 JP54.2 L27.2
OUT-27 [power]: C55.2 CH28.1 JP56.2 L28.2
OUT-28 [power]: C57.2 CH29.1 JP58.2 L29.2
OUT-29 [power]: C59.2 CH30.1 JP60.2 L30.2
SW: D1.A L1.1 U1.1
SW1: D2.A L2.1 U2.1
SW2: D3.A L3.1 U3.1
SW3: D4.A L4.1 U4.1
SW4: D5.A L5.1 U5.1
SW5: D6.A L6.1 U6.1
SW6: D7.A L7.1 U7.1
SW7: D8.A L8.1 U8.1
SW8: D9.A L9.1 U9.1
SW9: D10.A L10.1 U10.1
SW10: D11.A L11.1 U11.1
SW11: D12.A L12.1 U12.1
SW12: D13.A L13.1 U13.1
SW13: D14.A L14.1 U14.1
SW14: D15.A L15.1 U15.1
SW15: D16.A L16.1 U16.1
SW16: D17.A L17.1 U17.1
SW17: D18.A L18.1 U18.1
SW18: D19.A L19.1 U19.1
SW19: D20.A L20.1 U20.1
SW20: D21.A L21.1 U21.1
SW21: D22.A L22.1 U22.1
SW22: D23.A L23.1 U23.1
SW23: D24.A L24.1 U24.1
SW24: D25.A L25.1 U25.1
SW25: D26.A L26.1 U26.1
SW26: D27.A L27.1 U27.1
SW27: D28.A L28.1 U28.1
SW28: D29.A L29.1 U29.1
SW29: D30.A L30.1 U30.1
VIN: C2.1 D1.C JP1.2 R1.1 U1.5
VIN1: C4.1 D2.C JP3.2 R2.1 U2.5
VIN2: C6.1 D3.C JP5.2 R3.1 U3.5
VIN3: C8.1 D4.C JP7.2 R4.1 U4.5
VIN4: C10.1 D5.C JP9.2 R5.1 U5.5
VIN5: C12.1 D6.C JP11.2 R6.1 U6.5
VIN6: C14.1 D7.C JP13.2 R7.1 U7.5
VIN7: C16.1 D8.C JP15.2 R8.1 U8.5
VIN8: C18.1 D9.C JP17.2 R9.1 U9.5
VIN9: C20.1 D10.C JP19.2 R10.1 U10.5
VIN10: C22.1 D11.C JP21.2 R11.1 U11.5
VIN11: C24.1 D12.C JP23.2 R12.1 U12.5
VIN12: C26.1 D13.C JP25.2 R13.1 U13.5
VIN13: C28.1 D14.C JP27.2 R14.1 U14.5
VIN14: C30.1 D15.C JP29.2 R15.1 U15.5
VIN15: C32.1 D16.C JP31.2 R16.1 U16.5
VIN16: C34.1 D17.C JP33.2 R17.1 U17.5
VIN17: C36.1 D18.C JP35.2 R18.1 U18.5
VIN18: C38.1 D19.C JP37.2 R19.1 U19.5
VIN19: C40.1 D20.C JP39.2 R20.1 U20.5
VIN20: C42.1 D21.C JP41.2 R21.1 U21.5
VIN21: C44.1 D22.C JP43.2 R22.1 U22.5
VIN22: C46.1 D23.C JP45.2 R23.1 U23.5
VIN23: C48.1 D24.C JP47.2 R24.1 U24.5
VIN24: C50.1 D25.C JP49.2 R25.1 U25.5
VIN25: C52.1 D26.C JP51.2 R26.1 U26.5
VIN26: C54.1 D27.C JP53.2 R27.1 U27.5
VIN27: C56.1 D28.C JP55.2 R28.1 U28.5
VIN28: C58.1 D29.C JP57.2 R29.1 U29.5
VIN29: C60.1 D30.C JP59.2 R30.1 U30.5